# Altium PCB 20K Control Board V1.1.PcbDoc (part 12 of 24)
Units mm, origin at the board's own origin, x right, y up, seen from the top; angles counter-clockwise.
Board outline 132 x 260 mm, 4 copper layers (Top Layer, GND, VCC, Bottom Layer); 1384 components, 779 nets, 4515 pads, 1774 vias.
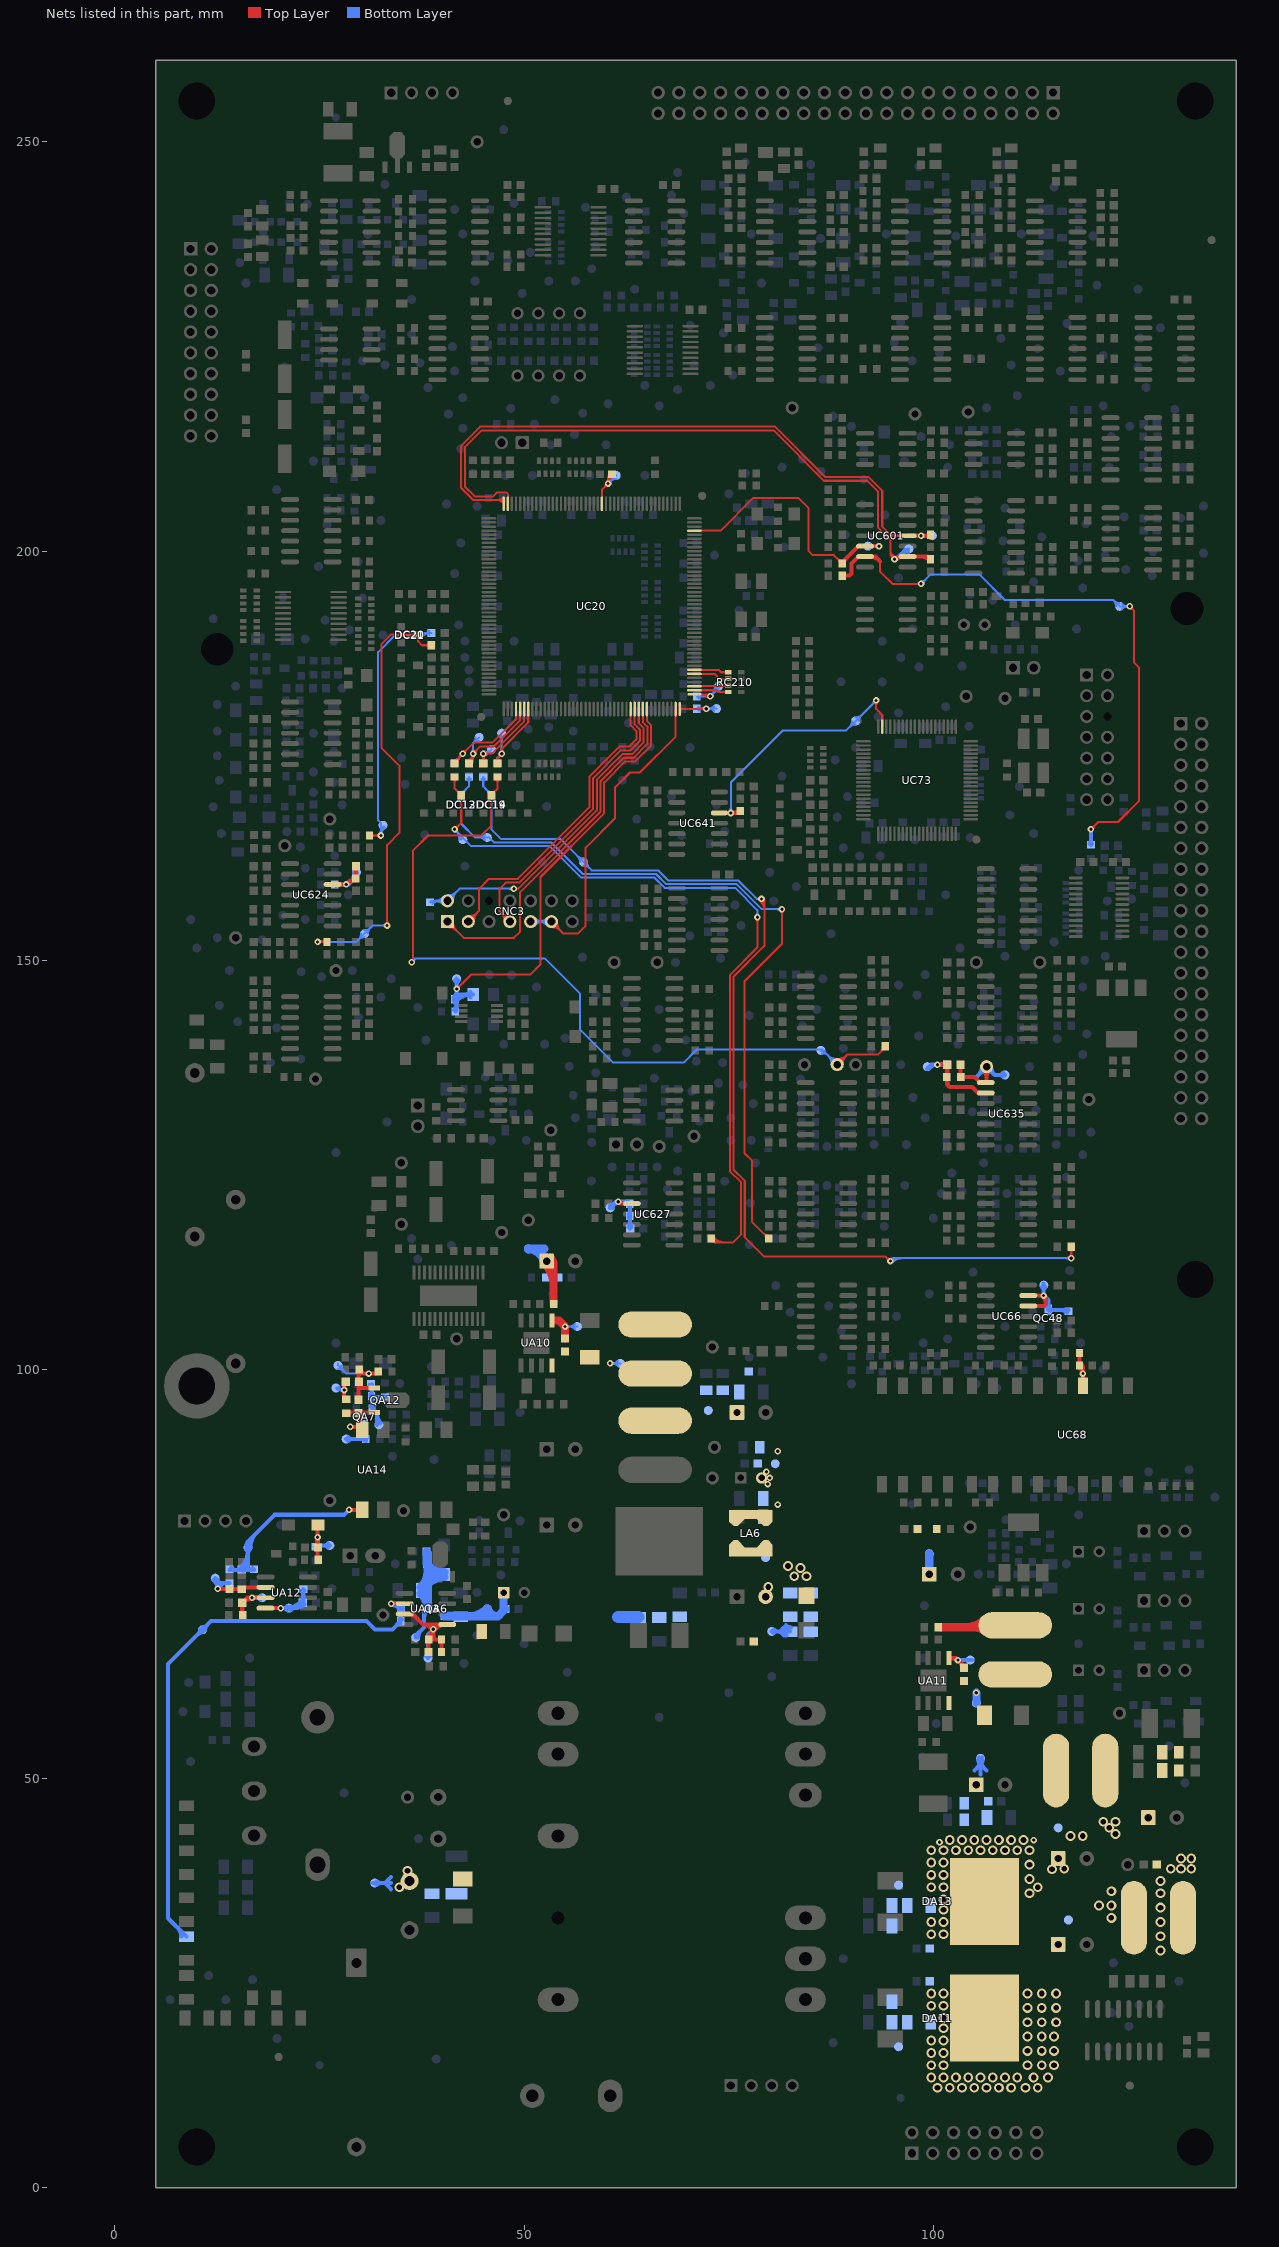
[diagram p14: the nets of this part, all layers, seen from the top]

## Via types
v1: diameter 0.8, hole 0.4, Top Layer to Bottom Layer, tented both sides, 1354 vias
v2: diameter 1.2, hole 0.7, Top Layer to Bottom Layer, 261 vias
v3: diameter 0.8, hole 0.4, Top Layer to Bottom Layer, 58 vias
v4: diameter 1.2, hole 0.7, Top Layer to Bottom Layer, tented top, 58 vias
v5: diameter 0.8, hole 0.4, Top Layer to Bottom Layer, tented top, 22 vias
v6: diameter 1.2, hole 0.7, Top Layer to Bottom Layer, tented both sides, 13 vias
v7: diameter 1.2, hole 0.7, Top Layer to Bottom Layer, tented bottom, 8 vias

## Nets (pads, with @x,y where several pads share a name; then routed paths per layer and width w, separated by ;. In a path a pad name is that pad's centre, name@x,y a point inside that pad or via, vN(x,y) a via of type N, cw(c..) or ccw(c..) an arc to the next point about the centre after c; other vN are vias at no path point) (continued)
M.GFCI: DC19.3 pad.ICT@86.25,139 RC171.2 RC241.1 TP20.1 | length 115.2
  Top Layer w0.25: v1(36.25,149.75) 36.425,149.925 36.425,163.425 38.25,165.25 44.75,165.25 45.965,166.465 DC19.3@45.965,170.032 45.965,170.215 46.75,171 RC241.1@46.75,172.4 ; DC19.3@45.73,169.619 cw(c45.163,169.052) 45.965,169.052 cw(c46.767,169.052) DC19.3@46.2,169.619 ; DC19.3@45.965,170.542 ccw(c45.965,171.331) 46.523,170.773 ; DC19.3@46.297,170.21 cw(c47.112,170.21) 46.536,170.786 ; RC241.1@46.52,172.17 cw(c45.965,171.615) 46.75,171.615 cw(c47.535,171.615) RC241.1@46.98,172.17 ; TP20.1@88,137.25 TP20.1@88.125,137.375 ; TP20.1@88.25,137.25 89.5,138.5 93.25,138.5 94.1,139.35 RC171.2@94.1,139.5 ; TP20.1@88.25,137.675 ccw(c88.25,138.701) 88.976,137.976 ccw(c89.701,137.25) TP20.1@88.675,137.25 ; TP20.1@88.25,137.925 ccw(c88.25,139.555) 89.402,138.402 ccw(c90.555,137.25) TP20.1@88.925,137.25 ; 93.474,138.724 ccw(c92.749,139.45) RC171.2@93.775,139.45 ; 93.716,138.966 cw(c94.1,138.582) RC171.2@94.1,139.125
  Bottom Layer w0.25: v1(36.25,149.75) 36.75,150.25 52.523,150.25 56.8,145.973 56.8,141.564 60.864,137.5 69.5,137.5 71.1,139.1 86.4,139.1 86.903,138.597 TP20.1@88.25,137.25 ; v1@36.25,150.025 ccw(c36.25,150.689) 36.719,150.219 ccw(c37.189,149.75) v1@36.525,149.75 ; pad.ICT@86.313,138.837 cw(c86.463,138.45) 86.757,138.743 ; pad.ICT@86.404,138.604 cw(c86.615,138.059) 87.028,138.472 ; pad.ICT@86.675,139 ccw(c87.097,139) 86.799,138.701 ; TP20.1@87.575,137.25 ccw(c85.945,137.25) 87.098,138.402 ccw(c88.25,139.555) TP20.1@88.25,137.925 ; TP20.1@87.825,137.25 ccw(c86.799,137.25) 87.524,137.976 ccw(c88.25,138.701) TP20.1@88.25,137.675
M.GFCI.AD: CC149.2 pad.ICT@47.25,177.75 RC241.2 UC20.51 | length 19.3
  Top Layer w0.25: RC241.2@46.555,174.36 ccw(c46.263,174.75) 46.75,174.75 ; RC241.2@46.75,174.05 RC241.2@46.775,174.075 ; RC241.2@46.75,174.1 46.75,174.75 ; RC241.2@46.945,174.36 cw(c47.237,174.75) 46.75,174.75 ; v1@46.975,175.25 cw(c46.311,175.25) 46.781,174.781 cw(c47.25,174.311) v1@47.25,174.975 ; v1@47.079,175.466 ccw(c46.801,175.818) 47.25,175.818 ; v1@47.421,175.466 cw(c47.699,175.818) 47.25,175.818 ; UC20.51@50.5,180.7 50.5,179.068 47.25,175.818 ; 46.75,174.75 v1(47.25,175.25) 47.25,175.818
  Bottom Layer w0.25: CC149.2@46.542,174.362 ccw(c46.284,174.75) 46.75,174.75 ; CC149.2@46.75,174.05 CC149.2@46.75,174.1 ; CC149.2@46.85,174.1 CC149.2@46.75,174.1 ; pad.ICT@46.949,177.449 cw(c46.224,176.724) 47.25,176.724 cw(c48.276,176.724) pad.ICT@47.551,177.449 ; CC149.2@46.958,174.362 cw(c47.216,174.75) 46.75,174.75 ; v1@46.975,175.25 cw(c46.311,175.25) 46.781,174.781 cw(c47.25,174.311) v1@47.25,174.975 ; v1@47.056,175.444 ccw(c46.586,175.914) 47.25,175.914 ccw(c47.914,175.914) v1@47.444,175.444 ; pad.ICT@47.25,177.5 v1(47.25,175.25) 46.75,174.75 ; CC149.2@46.75,174.1 46.75,174.75
M.RELAY.CONTROL: pad.ICT@92,200.605 RC253.2 UC20.129 UC601.5 | length 37.8
  Top Layer w0.25: UC20.129@70.8,202.5 73.25,202.5 ; 73.5,202.5 73.25,202.5 ; 88.21,199.14 ccw(c88.85,199.78) RC253.2@88.85,198.875 ; 88.331,199.019 cw(c87.861,198.55) RC253.2@88.525,198.55 ; RC253.2@88.9,198.55 RC253.2@88.85,198.5 87.85,199.5 85.25,199.5 84.75,200 84.75,205.25 83.5,206.5 81.5,206.5 78,206.5 74,202.5 73.25,202.5
  Top Layer w0.5: RC253.2@88.85,198.6 90.855,200.605 UC601.5@91.65,200.605 v1(93.355,200.605) ; RC253.2@89.05,198.55 cw(c89.654,198.55) RC253.2@89.227,198.977
  Bottom Layer w0.25: pad.ICT@91.645,200.605 v1(93.355,200.605) ; pad.ICT@92.301,200.304 cw(c93.026,199.579) 93.026,200.605 cw(c93.026,201.631) pad.ICT@92.301,200.906 ; v1@93.161,200.411 ccw(c92.691,199.941) 92.691,200.605 ccw(c92.691,201.269) v1@93.161,200.799
M.RELY.CNTL: pad.ICT@122.75,193.25 RC254.1 RC360.2 UC601.6 | length 86.2
  Top Layer w0.25: 93.5,198.75 93.5,197.5 95,196 v1(98.5,196) ; v1@98.306,195.806 ccw(c97.836,195.336) 97.836,196 ccw(c97.836,196.664) v1@98.306,196.194 ; v1(119.25,166) 120.15,166.9 122.559,166.9 125.15,169.491 125.15,185.759 124.5,186.409 124.5,192.75 v1(124,193.25) ; v1@119.25,166.275 ccw(c119.25,166.939) 119.719,166.469 ccw(c120.189,166) v1@119.525,166 ; v1@124,192.975 cw(c124,192.311) 124.469,192.781 cw(c124.939,193.25) v1@124.275,193.25
  Top Layer w0.5: RC254.1@88.85,197 89.75,197 90,197.25 90,198.5 90.835,199.335 UC601.6@91.65,199.335 92.915,199.335 93.5,198.75 ; RC254.1@88.991,196.859 cw(c89.333,196.517) 89.333,197 cw(c89.333,197.483) RC254.1@88.991,197.141 ; UC601.6@92.45,199.285 cw(c92.45,198.042) 93.329,198.921 ; UC601.6@92.463,199.287 cw(c92.645,198.6) 93.147,199.103
  Bottom Layer w0.25: v1(98.5,196) 98.525,196 99.675,197.15 105.6,197.15 108.75,194 122,194 pad.ICT@122.75,193.25 v1(124,193.25) ; v1@98.5,196.275 ccw(c98.5,197) 99.013,196.487 ; v1@98.775,196 cw(c99.378,196) 98.952,196.426 ; pad.ICT@122.325,193.25 ccw(c121.299,193.25) 122.024,193.976 ccw(c122.75,194.701) pad.ICT@122.75,193.675 ; pad.ICT@123.051,192.949 cw(c123.776,192.224) 123.776,193.25 cw(c123.776,194.276) pad.ICT@123.051,193.551 ; v1@123.806,193.056 ccw(c123.336,192.586) 123.336,193.25 ccw(c123.336,193.914) v1@123.806,193.444
  Bottom Layer w0.5: RC360.2@119.109,164.241 ccw(c118.767,164.583) 119.25,164.583 ccw(c119.733,164.583) RC360.2@119.391,164.241 ; RC360.2@119.25,164.1 v1(119.25,166)
M.SEL_A: pad.2@97,200.25 RC244.2 UC20.175 UC601.9 | length 98.1
  Top Layer w0.25: UC20.175@48,205.8 48,207 47.85,207.15 46.65,207.15 46.2,206.7 43.95,206.7 42.75,207.9 42.75,212.679 44.821,214.75 80.477,214.75 86.627,208.6 91.9,208.6 93.25,207.25 93.25,202.864 94.75,201.364 94.75,199.835 ; v1@94.975,199 ccw(c94.311,199) 94.781,199.469 ccw(c95.25,199.939) v1@95.25,199.275 ; 94.99,199.595 cw(c94.423,199.027) v1@95.225,199.001 ; v1@95.091,199.159 cw(c95.516,198.734) 95.516,199.335 ; v1@95.406,199.226 ccw(c95.521,199.394) 95.665,199.25 ; UC601.9@95.914,199.25 ccw(c95.914,198.336) 95.268,198.982 cw(c96.119,198.131) UC601.9@96.119,199.335 ; UC601.9@95.926,199.211 ccw(c95.628,198.913) 95.628,199.335 ccw(c95.628,199.757) UC601.9@95.926,199.459 ; UC601.9@96.517,199.25 ccw(c96.517,197.733) 95.444,198.806 cw(c96.723,197.527) UC601.9@96.723,199.335 ; UC601.9@96.765,199.25 95.665,199.25 ; UC601.9@96.85,199.335 95.25,199.335 94.75,199.835 ; 94.75,199.835 94.75,199.5 v1(95.25,199) 95.415,199 95.665,199.25
  Top Layer w0.5: UC601.9@96.85,199.335 99.315,199.335 RC244.2@99.65,199 ; 98.479,199.335 cw(c98.479,197.879) RC244.2@99.509,198.909
  Bottom Layer w0.25: v1(95.25,199) 96.5,200.25 pad.2@97,200.25 ; v1@95.25,199.275 ccw(c95.25,199.939) 95.719,199.469 ccw(c96.189,199) v1@95.525,199 ; v1@95.421,199.171 cw(c97,197.592) pad.2@97,199.825 ; 95.848,199.598 cw(c97,198.445) pad.2@97,200.075 ; 96.274,200.024 cw(c97,199.299) pad.2@97,200.325
M.SEL_B: pad.ICT@99.875,201.875 RC250.2 UC20.176 UC601.11 | length 85.1
  Top Layer w0.25: 46.715,206.25 ccw(c46.715,207.335) UC20.176@47.482,206.568 ; 47.05,206.25 UC20.176@47.5,205.8 47.5,206.45 47.3,206.25 43.764,206.25 42.3,207.714 42.3,212.866 44.634,215.2 80.664,215.2 86.814,209.05 92.086,209.05 93.75,207.386 93.75,203 94.875,201.875 UC601.11@96.85,201.875 ; UC20.176@47.387,206.337 ccw(c47.173,206.55) UC20.176@47.475,206.55 ; UC601.11@95.926,201.751 ccw(c95.628,201.453) 95.628,201.875 ccw(c95.628,202.297) UC601.11@95.926,201.999
  Top Layer w0.5: UC601.11@96.85,201.875 v1(98.5,201.875) RC250.2@99.65,201.875 ; 98.986,201.875 ccw(c98.986,202.614) RC250.2@99.509,202.091
  Bottom Layer w0.25: v1(98.5,201.875) pad.ICT@99.875,201.875 ; v1@98.694,201.681 cw(c99.164,201.211) 99.164,201.875 cw(c99.164,202.539) v1@98.694,202.069 ; pad.ICT@99.574,201.574 ccw(c98.849,200.849) 98.849,201.875 ccw(c98.849,202.901) pad.ICT@99.574,202.176
M.T\R\S\T\: CNC3.2 RC283.2 UC20.78 | length 52.8
  Top Layer w0.25: CNC3.2@40.63,157.27 CNC3.2@40.63,157.766 ; v1(48.75,158.75) 49.298,158.75 ; v1@48.97,158.586 cw(c49.298,158.341) 49.298,158.75 ; v1@48.97,158.914 ccw(c49.298,159.159) 49.298,158.75 ; UC20.78@63.975,180.7 UC20.78@64,180.7 ; UC20.78@64,180.475 64,178.977 64.603,178.374 64.603,176.624 63.182,175.204 61.999,175.204 58.875,172.08 58.875,168.327 49.298,158.75
  Bottom Layer w0.25: RC283.2@38.5,157.1 38.67,157.27 CNC3.2@40.63,157.27 42.11,158.75 v1(48.75,158.75) ; RC283.2@38.603,157.047 cw(c39.141,156.509) 39.141,157.27 ; RC283.2@38.78,156.87 cw(c39.745,155.905) 39.745,157.27 ; CNC3.2@40.153,156.793 ccw(c39,155.64) 39,157.27 ccw(c39,158.9) CNC3.2@40.153,157.747 ; CNC3.2@40.329,156.969 ccw(c39.604,156.244) 39.604,157.27 ccw(c39.604,158.296) CNC3.2@40.329,157.571 ; CNC3.2@40.63,157.695 ccw(c40.63,158.721) 41.356,157.996 ccw(c42.081,157.27) CNC3.2@41.055,157.27 ; CNC3.2@40.63,157.945 ccw(c40.63,159.575) 41.782,158.422 ccw(c42.935,157.27) CNC3.2@41.305,157.27 ; v1@48.556,158.556 ccw(c48.086,158.086) 48.086,158.75 ccw(c48.086,159.414) v1@48.556,158.944
M.TCK: CNC3.9 CNC3.11 UC20.87 | length 52
  Top Layer w0.25: CNC3.11@53.33,154.055 cw(c53.33,152.425) 54.482,153.578 cw(c55.635,154.73) CNC3.11@54.005,154.73 ; CNC3.11@53.33,154.305 cw(c53.33,153.279) 54.056,154.004 cw(c54.781,154.73) CNC3.11@53.755,154.73 ; CNC3.11@53.33,154.73 54.81,153.25 56.522,153.25 57.5,154.228 57.5,163.77 61.125,167.395 61.125,171.148 62.927,172.95 64.11,172.95 68.5,177.34 UC20.87@68.5,180.7
  Bottom Layer w0.25: CNC3.9@50.79,154.73 CNC3.11@53.33,154.73 ; CNC3.9@51.091,154.429 cw(c51.816,153.704) 51.816,154.73 cw(c51.816,155.756) CNC3.9@51.091,155.031 ; CNC3.9@51.267,154.253 cw(c52.42,153.1) 52.42,154.73 cw(c52.42,156.36) CNC3.9@51.267,155.207 ; CNC3.11@52.853,154.253 ccw(c51.7,153.1) 51.7,154.73 ccw(c51.7,156.36) CNC3.11@52.853,155.207 ; CNC3.11@53.029,154.429 ccw(c52.304,153.704) 52.304,154.73 ccw(c52.304,155.756) CNC3.11@53.029,155.031
M.TDI: CNC3.3 UC20.76 | length 41.7
  Top Layer w0.25: CNC3.3@43.17,154.73 44.5,156.06 44.5,158.75 45.7,159.95 49.225,159.95 57.975,168.7 57.975,172.453 61.63,176.108 62.808,176.108 63.699,176.999 63.699,177.5 63.699,178 63,178.699 UC20.76@63,180.7 ; CNC3.3@43.17,155.155 ccw(c43.17,156.181) 43.896,155.456 ccw(c44.621,154.73) CNC3.3@43.595,154.73 ; CNC3.3@43.17,155.405 ccw(c43.17,157.035) 44.322,155.882 ccw(c45.475,154.73) CNC3.3@43.845,154.73
M.TDO: CNC3.7 UC20.77 | length 39.7
  Top Layer w0.25: CNC3.7@47.575,154.73 ccw(c45.945,154.73) 47.098,155.882 ccw(c48.25,157.035) CNC3.7@48.25,155.405 ; CNC3.7@47.825,154.73 ccw(c46.799,154.73) 47.524,155.456 ccw(c48.25,156.181) CNC3.7@48.25,155.155 ; CNC3.7@48.25,154.73 47,155.98 47,158.75 47.75,159.5 49.412,159.5 58.425,168.513 58.425,172.266 61.815,175.656 62.995,175.656 64.151,176.811 64.151,178.187 63.5,178.838 UC20.77@63.5,180.7
M.TESTPOINT1: RC210.4 UC20.90 | length 4.7
  Top Layer w0.25: UC20.90@70.8,183 73.5,183 73.7,182.8 RC210.4@74.95,182.8 ; RC210.4@74.712,182.712 ccw(c74.498,182.498) 74.498,182.8 ccw(c74.498,183.102) RC210.4@74.712,182.888
M.TESTPOINT2: RC210.3 UC20.91 | length 4.5
  Top Layer w0.25: UC20.91@70.8,183.5 RC210.3@74.8,183.5 ; 74.257,183.5 ccw(c74.257,184.143) RC210.3@74.712,183.688
M.TESTPOINT3: RC210.2 UC20.94 | length 4.9
  Top Layer w0.25: UC20.94@70.8,185 73.25,185 73.85,184.4 RC210.2@74.95,184.4 ; RC210.2@74.712,184.312 ccw(c74.498,184.098) 74.498,184.4 ccw(c74.498,184.702) RC210.2@74.712,184.488
M.TESTPOINT4: RC210.1 UC20.95 | length 4.7
  Top Layer w0.25: UC20.95@70.8,185.5 73.75,185.5 74.05,185.2 RC210.1@74.95,185.2 ; RC210.1@74.712,185.112 ccw(c74.498,184.898) 74.498,185.2 ccw(c74.498,185.502) RC210.1@74.712,185.288
M.TMS: CNC3.1 UC20.79 | length 48.8
  Top Layer w0.25: CNC3.1@40.63,154.055 cw(c40.63,152.425) 41.782,153.578 cw(c42.935,154.73) CNC3.1@41.305,154.73 ; CNC3.1@40.63,154.305 cw(c40.63,153.279) 41.356,154.004 cw(c42.081,154.73) CNC3.1@41.055,154.73 ; CNC3.1@40.63,154.73 42.61,152.75 48.75,152.75 49.5,153.5 49.5,158.315 59.325,168.14 59.325,171.893 62.186,174.754 63.369,174.754 65.053,176.438 65.053,178.561 64.5,179.113 UC20.79@64.5,180.7 UC20.79@64.475,180.675
M.VGRIDR: DC12.3 pad.ICT@42.5,164.75 RC14.2 RC218.1 | length 111.1
  Top Layer w0.25: RC218.1@41.27,172.17 cw(c40.715,171.615) 41.5,171.615 cw(c42.285,171.615) RC218.1@41.73,172.17 ; v1(41.5,166) 42.31,166.81 DC12.3@42.31,170.032 42.31,170.19 41.5,171 RC218.1@41.5,172.4 ; v1@41.5,166.275 ccw(c41.5,166.939) 41.969,166.469 ccw(c42.439,166) v1@41.775,166 ; 41.709,170.791 ccw(c42.31,171.392) DC12.3@42.31,170.542 ; 41.757,170.743 cw(c41.224,170.21) DC12.3@41.978,170.21 ; DC12.3@42.075,169.619 cw(c41.508,169.052) 42.31,169.052 cw(c43.112,169.052) DC12.3@42.545,169.619 ; RC14.2@72.726,115.826 ccw(c73.514,116.614) 73.514,115.5 ; RC14.2@72.85,116 73.35,115.5 75.475,115.5 76.5,116.525 76.5,122.864 75.125,124.239 75.125,148.193 78.5,151.568 v1(78.5,155.25) ; RC14.2@72.901,115.629 cw(c72.987,115.087) 73.375,115.475 ; RC14.2@72.903,116.003 ccw(c74.117,117.217) 74.117,115.5 ; RC14.2@73.08,116.18 ccw(c74.721,117.821) 74.721,115.5 ; RC14.2@73.175,115.95 ccw(c73.839,115.95) 73.369,115.481 ; v1@78.306,155.056 cw(c77.836,154.586) 78.5,154.586 cw(c79.164,154.586) v1@78.694,155.056
  Bottom Layer w0.25: v1@41.5,165.725 cw(c41.5,165.061) 41.969,165.531 cw(c42.439,166) v1@41.775,166 ; v1(41.5,166) 43.55,163.95 46.25,163.95 ; v1@41.598,165.902 cw(c40.445,164.75) pad.ICT@42.075,164.75 ; 42.024,165.476 cw(c41.299,164.75) pad.ICT@42.325,164.75 ; 42.201,165.299 ccw(c42.5,165.597) pad.ICT@42.5,165.175 ; 44.55,163.95 46.25,163.95 ; v1@78.306,155.444 ccw(c77.836,155.914) 78.5,155.914 ccw(c79.164,155.914) v1@78.694,155.444 ; v1(78.5,155.25) 78.5,156.122 75.772,158.85 67.173,158.85 65.923,160.1 56.95,160.1 53.1,163.95 46.25,163.95
M.VGRIDR.AD: CC132.2 RC218.2 UC20.48 | length 19.7
  Top Layer w0.25: RC218.2@41.541,174.067 RC218.2@41.567,174.092 ; RC218.2@41.55,174.425 ccw(c41.55,174.727) RC218.2@41.763,174.513 ; RC218.2@41.567,174.067 RC218.2@41.567,174.092 ; RC218.2@41.625,174.1 cw(c42.289,174.1) 41.819,174.569 ; RC218.2@41.875,174.1 cw(c43.142,174.1) v1@42.246,174.996 ; v1@42.225,175.25 cw(c41.561,175.25) 42.031,174.781 cw(c42.5,174.311) v1@42.5,174.975 ; v1@42.5,175.525 ccw(c42.5,176.189) 42.969,175.719 ccw(c43.439,175.25) v1@42.775,175.25 ; UC20.48@48.975,180.675 UC20.48@49,180.7 49,179.477 46.123,176.6 43.85,176.6 v1(42.5,175.25) 41.567,174.317 RC218.2@41.567,174.092
  Bottom Layer w0.25: CC132.2@41.5,174.05 41.5,174.25 v1(42.5,175.25) ; CC132.2@41.5,174.425 ccw(c41.5,174.847) CC132.2@41.799,174.549 ; CC132.2@41.625,174.05 cw(c42.41,174.05) 41.855,174.605 ; CC132.2@41.875,174.05 cw(c43.263,174.05) v1@42.282,175.032 ; v1@42.225,175.25 cw(c41.561,175.25) 42.031,174.781 cw(c42.5,174.311) v1@42.5,174.975
M.VGRIDR.ZERO: pad.ICT@73.5,180.75 RC513.1 UC20.88 | length 12.3
  Top Layer w0.25: UC20.88@69,180.45 69.25,180.7 ; UC20.88@69,180.7 69.25,180.7 ; UC20.88@69,180.95 69.25,180.7 ; 71.465,180.7 ccw(c71.465,181.535) v1@72.056,180.944 ; 71.707,180.7 cw(c71.707,180.207) v1@72.056,180.556 ; v1@72.2,180.7 69.25,180.7
  Bottom Layer w0.25: RC513.1@71.1,180.75 v1(72.25,180.75) pad.ICT@73.5,180.75 ; RC513.1@71.33,180.52 cw(c71.885,179.965) 71.885,180.75 cw(c71.885,181.535) RC513.1@71.33,180.98 ; v1@72.056,180.556 ccw(c71.586,180.086) 71.586,180.75 ccw(c71.586,181.414) v1@72.056,180.944 ; v1@72.444,180.556 cw(c72.914,180.086) 72.914,180.75 cw(c72.914,181.414) v1@72.444,180.944 ; pad.ICT@73.199,180.449 ccw(c72.474,179.724) 72.474,180.75 ccw(c72.474,181.776) pad.ICT@73.199,181.051
M.VGRIDS: DC13.3 pad.ICT@45.5,165 RC72.2 RC219.1 | length 101.5
  Top Layer w0.25: 79.198,116.666 ccw(c79.9,117.368) RC72.2@79.9,116.375 ; 79.406,116.457 cw(c78.999,116.05) RC72.2@79.575,116.05 ; RC72.2@79.9,116 79.864,116 77.85,118.014 77.85,125.514 76.925,126.439 76.925,147.448 81.5,152.023 v1(81.499,156.251) ; v1@81.305,156.056 cw(c80.834,155.585) 81.5,155.585 ; 81.5,155.589 cw(c82.161,155.589) v1@81.694,156.056
  Bottom Layer w0.25: DC13.3@42.05,169.619 cw(c41.483,169.052) 42.285,169.052 cw(c43.087,169.052) DC13.3@42.52,169.619 ; DC13.3@42.285,170.032 42.285,166.715 44,165 pad.ICT@45.5,165 45.75,165 46.35,164.4 53.286,164.4 57.136,160.55 66.109,160.55 67.359,159.3 75.958,159.3 79.008,156.251 v1(81.499,156.251) ; DC13.3@42.285,170.285 43.25,171.25 RC219.1@43.25,172.4 ; DC13.3@42.285,170.542 ccw(c42.285,171.163) 42.724,170.724 ; DC13.3@42.617,170.21 cw(c43.6,170.21) 42.905,170.905 ; RC219.1@43.02,172.17 cw(c42.465,171.615) 43.25,171.615 cw(c44.035,171.615) RC219.1@43.48,172.17 ; pad.ICT@45.199,164.699 ccw(c44.474,163.974) 44.474,165 ccw(c44.474,166.026) pad.ICT@45.199,165.301 ; v1@81.305,156.056 ccw(c80.835,155.587) 80.835,156.251 ccw(c80.835,156.915) v1@81.305,156.445
M.VGRIDS.AD: CC133.2 pad.ICT@44.5,177.25 RC219.2 UC20.49 | length 26.3
  Top Layer w0.25: CC133.2@43.135,174.407 ccw(c42.865,175.25) v1(43.75,175.25) ; CC133.2@43.2,174.1 43.75,174.65 ; CC133.2@43.212,174.169 ccw(c42.975,174.907) v1@43.75,174.907 ; CC133.2@43.25,174.425 ccw(c43.25,175.089) 43.719,174.619 ; CC133.2@43.288,173.931 ccw(c43.085,174.564) 43.75,174.564 ; v1@43.57,175.042 cw(c43.233,174.65) 43.75,174.65 ; CC133.2@43.613,174.145 cw(c44.122,174.278) 43.75,174.65 ; v1@43.75,175.525 ccw(c43.75,176.189) 44.219,175.719 ccw(c44.689,175.25) v1@44.025,175.25 ; v1@43.93,175.042 ccw(c44.267,174.65) 43.75,174.65 ; UC20.49@49.5,180.7 49.5,179.341 46.309,176.15 44.65,176.15 v1(43.75,175.25) ; 43.75,174.65 v1(43.75,175.25)
  Bottom Layer w0.25: RC219.2@43.178,174.401 ccw(c42.834,175.25) v1(43.75,175.25) ; RC219.2@43.272,174.17 ccw(c42.985,174.879) v1@43.75,174.879 ; RC219.2@43.35,174.1 RC219.2@43.25,174.1 43.75,174.6 ; RC219.2@43.366,173.938 ccw(c43.135,174.508) RC219.2@43.75,174.508 ; v1@43.556,175.444 ccw(c43.086,175.914) 43.75,175.914 ccw(c44.414,175.914) v1@43.944,175.444 ; v1@43.559,175.053 cw(c43.119,174.6) 43.75,174.6 ; v1@43.941,175.053 ccw(c44.381,174.6) 43.75,174.6 ; pad.ICT@44.075,177.25 cw(c43.049,177.25) 43.774,176.524 cw(c44.5,175.799) pad.ICT@44.5,176.825 ; pad.ICT@44.5,177.25 43.75,176.5 v1(43.75,175.25) ; 43.75,174.6 v1(43.75,175.25)
M.VGRIDS.ZERO: pad.ICT@73.75,183.5 RC514.1 UC20.89 | length 13.1
  Top Layer w0.25: UC20.89@70.8,182.5 72.5,182.5 v1(72.75,182.25) ; UC20.89@71.483,182.5 cw(c71.483,180.983) v1@72.556,182.056 ; 72.086,182.5 cw(c72.086,181.586) v1@72.732,182.232
  Bottom Layer w0.25: RC514.1@71.1,182.25 v1(72.75,182.25) pad.ICT@74,183.5 ; RC514.1@71.33,182.02 cw(c71.885,181.465) 71.885,182.25 cw(c71.885,183.035) RC514.1@71.33,182.48 ; v1@72.556,182.056 ccw(c72.086,181.586) 72.086,182.25 ccw(c72.086,182.914) v1@72.556,182.444 ; v1@72.75,182.525 ccw(c72.75,183.189) 73.219,182.719 ccw(c73.689,182.25) v1@73.025,182.25 ; v1@72.875,182.375 ccw(c71.788,183.462) pad.ICT@73.325,183.492 ; 73.29,182.79 ccw(c72.603,183.478) pad.ICT@73.575,183.497 ; 73.451,182.951 cw(c73.75,182.653) pad.ICT@73.75,183.075
M.VGRIDT: DC14.3 pad.ICT@57.25,162 RC128.2 RC220.1 | length 147.7
  Top Layer w0.25: v1@78.806,157.306 cw(c77.491,155.991) 79.35,155.991 ; v1@78.982,157.482 cw(c78.095,156.595) 79.35,156.595 ; v1(79,157.5) 79.35,157.15 79.35,151.782 75.575,148.007 75.575,124.425 76.95,123.05 76.95,116.164 79.314,113.8 94.1,113.8 v1@94.7,113.2 ; v1@79.159,157.659 cw(c78.698,157.198) 79.35,157.198 ; 94.15,113.75 ccw(c94.696,114.296) v1@94.736,113.525 ; 94.351,113.549 cw(c94.052,113.25) v1@94.475,113.25 ; RC128.2@116.62,114.72 cw(c116.065,114.165) 116.85,114.165 cw(c117.635,114.165) RC128.2@117.08,114.72 ; v1@116.656,113.794 ccw(c116.186,114.264) 116.85,114.264 ccw(c117.514,114.264) v1@117.044,113.794 ; v1(116.85,113.6) RC128.2@116.85,115
  Bottom Layer w0.25: RC220.1@44.77,172.17 cw(c44.215,171.615) 45,171.615 cw(c45.785,171.615) RC220.1@45.23,172.17 ; RC220.1@45,172.4 45,171.25 45.341,170.909 46.035,170.215 DC14.3@46.035,170.032 46.035,165.965 47.15,164.85 54.4,164.85 58.25,161 66.35,161 67.6,159.75 76.145,159.75 78.395,157.5 ; 45.464,170.786 cw(c44.888,170.21) DC14.3@45.703,170.21 ; 45.477,170.773 ccw(c46.035,171.331) DC14.3@46.035,170.542 ; DC14.3@45.8,169.619 cw(c45.233,169.052) 46.035,169.052 cw(c46.837,169.052) DC14.3@46.27,169.619 ; pad.ICT@56.825,162 ccw(c55.799,162) 56.524,162.726 ccw(c57.25,163.451) pad.ICT@57.25,162.425 ; pad.ICT@57.25,161.575 cw(c57.25,160.549) 57.976,161.274 cw(c58.701,162) pad.ICT@57.675,162 ; v1@78.793,157.319 ccw(c78.395,156.972) 78.395,157.5 ; v1@78.793,157.681 cw(c78.395,158.028) 78.395,157.5 ; v1(79,157.5) 78.395,157.5 ; v1@94.591,113.409 cw(c95.052,112.948) 95.052,113.6 ; v1(94.75,113.25) 95.1,113.6 v1(116.85,113.6) ; v1@94.768,113.232 cw(c95.655,112.345) 95.655,113.6 ; v1@94.944,113.056 cw(c96.259,111.741) 96.259,113.6 ; v1@116.656,113.406 ccw(c116.186,112.936) 116.186,113.6 ccw(c116.186,114.264) v1@116.656,113.794
M.VGRIDT.AD: CC134.2 pad.ICT@46,175.75 RC220.2 UC20.50 | length 20.7
  Top Layer w0.25: CC134.2@44.735,174.315 ccw(c44.095,174.955) 45,174.955 ccw(c45.905,174.955) CC134.2@45.265,174.315 ; v1@44.806,175.056 cw(c44.336,174.586) 45,174.586 cw(c45.664,174.586) 45.194,175.056 cw(c45.664,174.586) 45.664,175.25 cw(c45.664,175.914) v1@45.194,175.444 ; CC134.2@45,174.05 v1(45,175.25) 46.046,175.25 50,179.204 UC20.50@50,180.7
  Bottom Layer w0.25: RC220.2@44.77,174.33 ccw(c44.215,174.885) 45,174.885 ccw(c45.785,174.885) RC220.2@45.23,174.33 ; v1@44.806,175.056 cw(c44.336,174.586) 45,174.586 cw(c45.664,174.586) v1@45.194,175.056 ; RC220.2@44.85,174.1 RC220.2@45,174.25 ; v1@44.937,175.034 ccw(c45.069,175.487) 45.403,175.153 ; v1@45.007,175.274 ccw(c45.204,175.949) pad.ICT@45.702,175.452 ; v1@45.077,175.514 ccw(c45.339,176.41) pad.ICT@46,175.75 45.5,175.25 ; RC220.2@45.1,174.1 RC220.2@45,174.1 RC220.2@45,174.25 ; v1@45.232,175.103 cw(c45.5,174.933) 45.5,175.25 ; v1@45.232,175.397 ccw(c45.5,175.567) 45.5,175.25 ; RC220.2@45,174.25 v1(45,175.25) 45.5,175.25
M.VPV1: DC21.3 pad.ICT@32.75,166.5 RC4.2 RC255.1 | length 41.3
  Top Layer w0.25: RC4.2@31.1,165.25 v1(32.5,165.25) ; RC4.2@31.33,165.02 cw(c31.885,164.465) 31.885,165.25 cw(c31.885,166.035) RC4.2@31.33,165.48 ; v1@32.306,165.056 ccw(c31.836,164.586) 31.836,165.25 ccw(c31.836,165.914) v1@32.306,165.444
  Bottom Layer w0.25: v1@32.306,165.444 ccw(c31.836,165.914) 32.5,165.914 ccw(c33.164,165.914) v1@32.694,165.444 ; v1@32.5,165.225 cw(c33.616,165.225) pad.ICT@32.989,166.148 ; v1(32.5,165.25) 32.5,166.75 32.15,167.1 32.15,187.65 34.215,189.715 DC21.3@37.032,189.715 37.317,190 RC255.1@38.65,190 ccw(c38.65,188.343) DC21.3@37.45,189.486 ; 32.5,165.697 cw(c33.295,165.697) pad.ICT@32.848,166.355 ; DC21.3@36.619,189.48 ccw(c36.052,188.913) 36.052,189.715 ccw(c36.052,190.517) DC21.3@36.619,189.95 ; DC21.3@37.269,189.658 cw(c38.066,188.899) 38.066,190 ; RC255.1@38.42,189.77 ccw(c37.865,189.215) 37.865,190 ccw(c37.865,190.785) RC255.1@38.42,190.23
M.VPV2: DC20.3 pad.ICT@30.5,153.25 RC33.2 RC256.1 | length 66.7
  Top Layer w0.25: v1(24.75,152.25) RC33.2@25.9,152.25 RC33.2@25.9,152.35 ; v1@24.944,152.056 cw(c25.414,151.586) 25.414,152.25 cw(c25.414,152.914) v1@24.944,152.444 ; RC33.2@25.67,152.02 ccw(c25.115,151.465) 25.115,152.25 ccw(c25.115,153.035) RC33.2@25.67,152.48 ; v1@33.056,154.444 ccw(c32.586,154.914) 33.25,154.914 ccw(c33.914,154.914) v1@33.444,154.444 ; v1(33.25,154.25) 33.25,164.068 34.75,165.568 34.75,173.775 32.55,175.975 32.55,188.643 33.692,189.785 DC20.3@37.032,189.785 ; DC20.3@36.619,189.55 ccw(c36.052,188.983) 36.052,189.785 ccw(c36.052,190.587) DC20.3@36.619,190.02 ; DC20.3@36.797,189.55 cw(c36.23,188.983) 37.032,188.983 cw(c37.834,188.983) DC20.3@37.267,189.55 ; DC20.3@37.032,190.035 DC20.3@37.032,189.785 ; RC256.1@38.42,188.27 ccw(c37.865,187.715) 37.865,188.5 ccw(c37.865,189.285) RC256.1@38.42,188.73 ; RC256.1@38.65,188.5 37.5,188.5 37.032,188.968 DC20.3@37.032,189.785
  Bottom Layer w0.25: v1(24.75,152.25) 29.5,152.25 31.5,154.25 v1(33.25,154.25) ; v1@24.944,152.056 cw(c25.414,151.586) 25.414,152.25 cw(c25.414,152.914) v1@24.944,152.444 ; pad.ICT@30.075,153.25 cw(c29.049,153.25) 29.774,152.524 cw(c30.5,151.799) pad.ICT@30.5,152.825 ; pad.ICT@30.5,153.675 ccw(c30.5,154.701) 31.226,153.976 ccw(c31.951,153.25) pad.ICT@30.925,153.25 ; v1@33.056,154.056 ccw(c32.586,153.586) 32.586,154.25 ccw(c32.586,154.914) v1@33.056,154.444
M.X\R\S\: CC170.2 DC25.1 pad.ICT@41.75,147.75 RC270.1 UC20.80 | length 65.5
  Top Layer w0.25: v1(41.75,146.5) 43.5,148.25 50.75,148.25 52,149.5 52,152.75 ; v1@41.75,146.775 ccw(c41.75,147.439) 42.219,146.969 ccw(c42.689,146.5) v1@42.025,146.5 ; 52,152.45 52,152.75 ; UC20.80@65,180.7 65,179.25 65.503,178.747 65.503,176.251 63.551,174.3 62.368,174.3 59.775,171.707 59.775,167.954 52,160.179 52,152.75
  Bottom Layer w0.5: CC170.2@41.373,145.073 cw(c40.464,144.164) RC270.1@41.75,144.164 ; RC270.1@41.459,143.941 ccw(c40.755,144.645) 41.75,144.645 ; pad.ICT@41.538,147.538 cw(c41.026,147.026) 41.75,147.026 cw(c42.474,147.026) pad.ICT@41.962,147.538 ; RC270.1@41.6,143.75 RC270.1@41.6,143.9 ; CC170.2@41.6,145.3 42.1,145.8 DC25.1@43.75,145.8 ; CC170.2@41.727,145.073 cw(c43.481,143.319) DC25.1@43.481,145.8 ; RC270.1@41.75,143.9 v1(41.75,146.5) pad.ICT@41.75,147.75 ; v1@41.75,146.336 cw(c40.464,146.336) 41.373,145.427 cw(c42.274,144.526) 42.274,145.8 ; DC25.1@43.432,145.482 ccw(c42.664,144.714) 42.664,145.8 ccw(c42.664,146.886) DC25.1@43.432,146.118
MCPUTOSCPU: pad.ICT@61.25,209.25 RC661.1 UC20.152 | length 14
  Top Layer w0.25: UC20.152@59.5,205.8 59.5,207.5 v1(60.25,208.25) 60.25,208.9 ; v1@59.975,208.25 cw(c59.311,208.25) 59.781,207.781 cw(c60.25,207.311) v1@60.25,207.975 ; v1@60.059,208.447 ccw(c59.619,208.9) 60.25,208.9 ; v1@60.25,208.165 cw(c61.296,208.165) RC661.1@60.841,209.107 ; v1@60.25,208.563 cw(c61.104,208.563) RC661.1@60.733,209.332 ; 60.25,208.962 cw(c60.912,208.962) RC661.1@60.624,209.558 ; RC661.1@60.385,209.321 cw(c59.98,209.22) 60.275,208.925 cw(c60.642,208.558) RC661.1@60.678,209.076 ; v1@60.441,208.447 cw(c60.881,208.9) 60.25,208.9 ; RC661.1@60.75,209.4 60.25,208.9
  Bottom Layer w0.25: v1(60.25,208.25) pad.ICT@61.25,209.25 ; v1@60.25,208.525 ccw(c60.25,209.189) 60.719,208.719 ccw(c61.189,208.25) v1@60.525,208.25 ; pad.ICT@60.825,209.25 cw(c59.799,209.25) 60.524,208.524 cw(c61.25,207.799) pad.ICT@61.25,208.825
MDSP_OK: pad.ICT@90.493,179.243 RC658.2 UC73.79 UC641.12 | length 40.3
  Top Layer w0.25: v1@92.806,181.556 cw(c92.336,181.086) 93,181.086 cw(c93.664,181.086) v1@93.194,181.556 ; v1(93,181.75) 93,180.725 93.75,179.975 ; 93.25,180.475 93.75,179.975 ; UC73.79@93.75,178.55 93.75,179.975
  Top Layer w0.5: UC641.12@73.85,168.02 RC658.2@76.38,168.02 ; UC641.12@74.84,168.02 cw(c74.84,167.59) v1@75.144,167.894 ; v1@75.356,167.894 cw(c75.66,167.59) 75.66,168.02 ; v1@75.483,168.02 ccw(c75.483,169.117) RC658.2@76.259,168.341
  Bottom Layer w0.25: v1@75.056,168.194 ccw(c74.586,168.664) 75.25,168.664 ccw(c75.914,168.664) v1@75.444,168.194 ; v1(75.25,168) 75.25,171.724 81.626,178.1 89.35,178.1 pad.ICT@90.493,179.243 v1(93,181.75) ; pad.ICT@90.068,179.243 cw(c89.042,179.243) 89.767,178.517 cw(c90.493,177.792) pad.ICT@90.493,178.818 ; pad.ICT@90.493,179.668 ccw(c90.493,180.694) 91.218,179.968 ccw(c91.944,179.243) pad.ICT@90.918,179.243 ; v1@92.725,181.75 cw(c92.061,181.75) 92.531,181.281 cw(c93,180.811) v1@93,181.475
MORRCPU-SEL: pad.ICT@118.27,98 RC602.1 RC634.1 UC68.3 | length 11.3
  Top Layer w0.5: RC634.1@117.709,100.691 ccw(c117.367,101.033) 117.85,101.033 ccw(c118.333,101.033) RC634.1@117.991,100.691 ; RC602.1@117.709,101.809 cw(c117.367,101.467) 117.85,101.467 cw(c118.333,101.467) RC602.1@117.991,101.809 ; RC634.1@117.755,100.274 cw(c117.29,99.411) v1@118.27,99.411 ; RC602.1@117.85,102 RC634.1@117.85,100.5 118.27,100.08 v1(118.27,99.5) UC68.3@118.27,98 ; RC634.1@117.992,100.714 cw(c117.742,100.249) RC634.1@118.27,100.249 ; UC68.3@118.023,98.647 ccw(c117.425,99.245) 118.27,99.245 ccw(c119.115,99.245) UC68.3@118.517,98.647
  Bottom Layer w0.5: pad.ICT@118.058,98.212 ccw(c117.546,98.724) 118.27,98.724 ccw(c118.994,98.724) pad.ICT@118.482,98.212 ; pad.ICT@118.27,98 v1(118.27,99.5)
MSCI: pad.ICT@113.5,110.31 QC48.3 RC605.1 UC66.12 UC66.13 | length 15.8
  Top Layer w0.5: UC66.12@111.6,107.77 113.52,107.77 113.75,108 113.75,108.75 v1(113.46,109.04) UC66.13@111.6,109.04 ; v1@113.354,108.934 cw(c112.398,107.978) 113.75,107.978
  Bottom Layer w0.5: pad.ICT@113.288,110.098 cw(c112.872,109.682) 113.46,109.682 ; 113.46,109.489 cw(c114.321,109.489) pad.ICT@113.712,110.098 ; pad.ICT@113.46,110.5 v1(113.46,109.04) 114.035,108.465 QC48.3@114.035,107.282 RC605.1@116.5,107.282 ; QC48.3@113.888,107.606 ccw(c113.535,107.96) 114.035,107.96 ccw(c114.535,107.96) QC48.3@114.181,107.606 ; QC48.3@114.181,107.135 cw(c114.535,106.782) 114.535,107.282 cw(c114.535,107.782) QC48.3@114.181,107.429 ; 115.528,107.282 cw(c115.528,106.178) RC605.1@116.309,106.959
NetCA1_2: CA1.2 CA91.2 CA96.1 DA11.2 DA11.4 LA10.1 pad.ICT@116.5,32.75
  other v2: 100.5,12.25 102,12.25 103.5,12.25 105,12.25 106.5,12.25 108,12.25 109.5,12.25 111.25,12.25 112.75,12.25 99.75,13.5 101.25,13.5 102.75,13.5 104.25,13.5 105.75,13.5 107.25,13.5 108.75,13.5 110.25,13.5 112.25,13.5 114,13.5 99.75,15 101.25,15 111.5,15 113.25,15 114.75,15 99.75,16.5 101.25,16.5 111.5,16.75 113.25,16.75 114.75,16.75 99.75,18 101.25,18 111.5,18.5 113.25,18.5 114.75,18.5 101.25,19.5 111.5,20.25 113.25,20.25 115,20.25 101.25,20.75 111.5,22 113.25,22 115,22 99.75,22.25 101.25,22.25 99.75,23.75 101.25,23.75 111.5,23.75 113.25,23.75 115,23.75
  other v4: 121.75,33 120.25,34.5 121.75,34.5 121.75,36.25
NetCA2_1: CA2.1 CA101.1 CA104.2 DA13.2 DA13.4 LA14.1 pad.ICT@115.25,44
  other v2: 99.75,31 101.25,31 99.75,32.5 101.25,32.5 101.25,34 101.25,35.25 111.75,36 99.75,36.75 101.25,36.75 112.75,36.75 111.75,37.75 99.75,38.25 101.25,38.25 99.75,39.75 101.25,39.75 99.75,41.25 101.25,41.25 102.75,41.25 104.25,41.25 105.75,41.25 107.25,41.25 108.75,41.25 110.25,41.25 102,42.5 103.5,42.5 105,42.5 106.5,42.5 108,42.5 109.5,42.5 111,42.5
  other v3: 100.75,42.25 112.25,42.5
  other v4: 114.5,38.94 116,39 111.75,39.5 111.75,41.25 116.75,43 118.25,43 122.25,43.25 121.5,44 120.75,44.75 122.25,44.75
NetCA4_1: CA4.1 CA6.2 CA81.2 CA83.2 DA10.1 LA6.1 pad.ICT@79.5,77.025
  other v2: 83,74.75 84.5,74.75 83.75,75.75 82.25,76
  other v4: 79.813,73.419
NetCA6_1: CA6.1 CA83.1 pad.ICT@80.25,68 RA118.2 RA121.2 | length 9.1
  Bottom Layer w0.5: pad.ICT@80.25,68 81.25,68 ; pad.ICT@80.462,67.788 cw(c80.974,67.276) 80.974,68 cw(c80.974,68.724) pad.ICT@80.462,68.212 ; 81.162,67.913 cw(c81.808,67.267) RA118.2@82.304,68.034 ; 81.405,68 ccw(c81.405,68.795) RA118.2@81.967,68.233 ; RA118.2@81.6,68.35 cw(c82.152,67.798) RA118.2@82.576,68.454 ; RA118.2@81.951,67.685 ccw(c81.25,67.064) 81.25,68 ; 82,68.75 81.25,68 ; RA118.2@82.05,67.5 81.75,67.5 81.25,68 ; RA118.2@82.45,68 81.25,68
NetCA68_1: CA68.1 pad.ICT@61.5,69.75 RA108.2 RA109.2 | length 2.5
  Bottom Layer w1.5: pad.ICT@61.5,69.75 RA109.2@63.95,69.75
NetCA69_1: CA69.1 pad.ICT@56.5,105.25 UA10.1 | length 7.2
  Top Layer w1: 53.75,106 54.25,106 v1(55,105.25) CA69.1@55,103.8
  Bottom Layer w0.25: v1(55,105.25) pad.ICT@56.5,105.25 ; v1@55.194,105.056 cw(c55.664,104.586) 55.664,105.25 cw(c55.664,105.914) v1@55.194,105.444 ; pad.ICT@56.199,104.949 ccw(c55.474,104.224) 55.474,105.25 ccw(c55.474,106.276) pad.ICT@56.199,105.551
NetCA69_2: CA69.2 DA7.2 LA4.1 pad.ICT@61.75,100.75 UA10.8 | length 3.9
  Bottom Layer w0.25: v1(60.5,100.75) pad.ICT@61.75,100.75 ; v1@60.694,100.556 cw(c61.164,100.086) 61.164,100.75 cw(c61.164,101.414) v1@60.694,100.944 ; pad.ICT@61.449,100.449 ccw(c60.724,99.724) 60.724,100.75 ccw(c60.724,101.776) pad.ICT@61.449,101.051
NetCA70_1: CA70.1 DA6.2 pad.ICT@31.75,37.25 RA110.1 RA114.1 | length 5.5
  Bottom Layer w0.5: pad.ICT@31.5,37.25 33,37.25 ; pad.ICT@31.962,37.038 cw(c32.474,36.526) 32.474,37.25 cw(c32.474,37.974) pad.ICT@31.962,37.462 ; 33.75,36.5 33,37.25 ; 33.75,37.25 33,37.25 ; 33.75,38 33,37.25
  other v2: 34.75,36.75 35.75,38.75
NetCA73_2: CA73.2 CA76.1 LA2.2 LA3.1 LA16.1 pad.ICT@72.5,95 RA112.1
NetCA77_2: CA77.2 CA78.1 LA4.2 pad.ICT@50.5,114.75 RA111.2 RA115.2 | length 18.1
  Top Layer w1: CA78.1@52.467,112.967 cw(c49.732,110.232) 53.6,110.232 ; CA78.1@52.75,113.25 53.6,112.4 RA115.2@53.6,108 ; CA78.1@53.174,113.674 cw(c52.146,112.646) CA78.1@53.6,112.646
  Bottom Layer w1: pad.ICT@50.5,114.7 cw(c50.5,112.769) 51.866,114.134 ; pad.ICT@50.5,114.75 51.25,114.75 ; pad.ICT@50.511,114.701 cw(c50.77,113.52) 51.625,114.375 ; CA78.1@52.35,113.25 ccw(c51.385,113.25) 52.067,113.933 ccw(c52.75,114.616) CA78.1@52.75,113.65 ; 52.5,114.75 51.25,114.75 ; CA78.1@52.75,113.25 51.25,114.75
NetCA79_1: CA79.1 CA80.1 pad.ICT@45.5,70.75 QA6.2 RA123.2 RA147.2 | length 14.5
  Bottom Layer w1: QA6.2@40.25,69.845 46.795,69.845 ; 43.194,69.845 ccw(c43.194,73.056) pad.ICT@45.465,70.785 ; pad.ICT@45.548,70.765 ccw(c46.795,71.15) 46.795,69.845 ; 47.48,71.281 ccw(c48.231,71.281) CA79.1@47.7,70.75 ; CA80.1@47.48,72.75 47.48,70.53 46.795,69.845
NetCA82_2: CA82.2 CA84.1 LA6.2 LA7.1 pad.ICT@80.683,88.483 RA119.2 RA120.2
  other v1: 81,83.5 79.75,86 80,86.75 79.6,87.5 81,90
NetCA90_1: CA90.1 pad.ICT@104.5,64.5 UA11.1 | length 6
  Top Layer w0.5: UA11.1@101.905,64.75 102.75,64.75 v1(103,64.5) 103.75,63.75 CA90.1@103.75,63.55 ; UA11.1@102.034,64.75 cw(c102.034,63.534) v1@102.894,64.394 ; v1@103.182,64.318 cw(c102.414,63.55) CA90.1@103.5,63.55
  Bottom Layer w0.5: v1(103,64.5) pad.ICT@104.7,64.5
NetCA90_2: CA90.2 DA12.2 LA12.1 pad.ICT@105.25,59.25 UA11.8 | length 1.3
  Bottom Layer w1: pad.ICT@105.25,59.25 v1(105.25,60.5)
NetCA91_1: CA91.1 pad.ICT@95.75,17.25 RA127.2 RA131.2
NetCA92_1: CA92.1 CA93.2 LA10.2 LA11.1 LA18.1 pad.ICT@130.25,34.25 RA129.1 RA132.1
  other v2: 129,39 130.25,39 131.5,39 130.25,40.25 131.5,40.25
  other v4: 127.75,29 127.75,30.75 127.75,32.5 127.75,34.25 127.75,36 127.75,37.5
NetCA98_1: CA98.1 CA100.1 LA14.2 LA15.1 LA20.1 pad.ICT@105.75,52.5 RA137.2 | length 12.5
  Bottom Layer w0.5: 105,51 105.75,51.75 ; 105.375,51.375 ccw(c104.815,51.935) pad.ICT@105.493,52.345 ; pad.ICT@105.579,52.603 ccw(c106.122,52.275) 105.673,51.827 ; 105.75,50.5 105.75,51.75 ; pad.ICT@105.75,52.5 105.75,51.75 ; 105.827,51.827 ccw(c105.378,52.275) pad.ICT@105.921,52.603 ; pad.ICT@106.007,52.345 ccw(c106.685,51.935) 106.125,51.375 ; 106.5,51 105.75,51.75 ; pad.ICT@105.538,52.288 cw(c105.026,51.776) 105.75,51.776 ; pad.ICT@105.538,52.288 cw(c105.026,51.776) 105.75,51.776 ; pad.ICT@105.538,52.288 cw(c105.026,51.776) 105.75,51.776 ; pad.ICT@105.538,52.288 cw(c105.026,51.776) 105.75,51.776 ; 105.75,51.776 cw(c106.474,51.776) pad.ICT@105.962,52.288 ; 105.75,51.776 cw(c106.474,51.776) pad.ICT@105.962,52.288 ; 105.75,51.776 cw(c106.474,51.776) pad.ICT@105.962,52.288 ; 105.75,51.776 cw(c106.474,51.776) pad.ICT@105.962,52.288
NetCA102_2: CA102.2 CA103.1 LA12.2 pad.ICT@99.5,77.5 RA126.2 RA134.2 | length 16.9
  Top Layer w1: RA134.2@101,68.5 LA12.2@109.75,68.5 ; 103.841,68.5 ccw(c103.841,72.009) LA12.2@106.322,69.528 ; 105.048,68.5 cw(c105.048,66.698) LA12.2@106.322,67.972
  Bottom Layer w1: CA103.1@99.217,75.283 ccw(c98.534,75.966) 99.5,75.966 ccw(c100.466,75.966) CA103.1@99.783,75.283 ; CA103.1@99.5,75 pad.ICT@99.5,77.5
NetCA104_1: CA104.1 pad.ICT@95.75,37 RA143.2 RA144.2
NetCA106_2: CA106.2 pad.ICT@18,72.115 RA149.2 UA12.3 | length 10.4
  Top Layer w0.5: CA106.2@15.495,71.445 cw(c16.75,70.191) v1@16.75,71.965 ; RA149.2@15.55,70.05 CA106.2@15.55,71.5 16.165,72.115 v1(16.75,72.115) UA12.3@18.4,72.115 ; CA106.2@15.873,71.823 cw(c16.395,71.3) v1@16.69,71.977
  Bottom Layer w0.5: v1(16.75,72.115) pad.ICT@18,72.115 ; 17.276,72.115 cw(c17.276,71.391) 17.788,71.903 ccw(c17.276,71.391) 17.276,72.115 ; 17.276,72.115 ccw(c17.276,72.839) 17.788,72.327 cw(c17.276,72.839) 17.276,72.115
NetCA108_2: CA108.2 pad.ICT@21.25,70.845 RA151.2 UA12.4 | length 16.9
  Top Layer w0.5: UA12.4@18.4,70.845 v1(20.25,70.845)
  Bottom Layer w0.5: v1(20.25,70.845) 22.295,70.845 23,71.55 RA151.2@23,73.15 ; pad.ICT@20.765,70.845 ccw(c20.765,73.685) 22.773,71.677 ccw(c22.226,72.224) 23,72.224 ; 21.972,70.845 ccw(c21.972,72.478) CA108.2@23.127,71.323 ; CA108.2@22.7,71.5 cw(c22.096,71.5) 22.523,71.073 cw(c22.95,70.646) CA108.2@22.95,71.25 ; RA151.2@22.859,73.009 cw(c22.517,72.667) 23,72.667 cw(c23.483,72.667) RA151.2@23.141,73.009 ; v1@20.526,70.845 cw(c20.526,70.121) 21.038,70.633 ccw(c20.526,70.121) v1@20.526,70.845 ; v1@20.526,70.845 ccw(c20.526,71.569) 21.038,71.057 cw(c20.526,71.569) v1@20.526,70.845 ; 21.974,70.845 cw(c21.974,71.569) 21.462,71.057 ccw(c21.974,71.569) 21.974,70.845 ; 21.974,70.845 ccw(c21.974,70.121) 21.462,70.633 cw(c21.974,70.121) 21.974,70.845
NetCA110_2: CA110.2 CA114.2 DA15.1 pad.ICT@36.75,67.25 QA6.3 RA156.2 | length 35.7
  Bottom Layer w0.5: pad.ICT@36.75,67.25 36.75,67.5 37.75,68.5 37.75,70.317 QA6.3@38.218,70.785 ; pad.ICT@37.05,67.25 cw(c38.378,67.25) 37.439,68.189 ; 37.75,69.584 cw(c39.241,69.584) QA6.3@38.187,70.638
  Bottom Layer w1: CA110.2@37.344,73.356 ccw(c35.234,75.466) 38.218,75.466 ; CA110.2@37.348,72.64 cw(c35.484,70.64) QA6.3@38.194,70.999 ; CA110.2@37.45,72.6 cw(c37.45,71.634) 38.133,72.317 ; CA110.2@37.45,73.4 ccw(c37.45,74.366) 38.133,73.683 ; CA110.2@37.458,73.6 cw(c37.451,72.833) 38.218,72.833 ; CA110.2@38.051,72.649 ccw(c37.648,73.052) 38.218,73.052 ; QA6.3@38.218,70.785 38.218,72.232 ; 38.287,73.837 cw(c40.25,71.874) DA15.1@40.25,74.65 ; RA156.2@38.525,75.825 ccw(c39.959,77.259) DA15.1@40.224,75.248 ; 38.975,74.525 cw(c39.755,73.746) DA15.1@40.174,74.765 ; 38.218,72.232 CA110.2@37.45,73 39.4,74.95 38.05,76.3 CA114.2@38.05,77.75 38.218,77.582 38.218,72.232 ; CA110.2@37.449,72.6 cw(c37.442,71.824) 38.218,71.824 ccw(c37.442,71.824) CA110.2@37.449,72.6
NetCA111_1: CA111.1 pad.ICT@12.25,74.5 RA166.2 RA178.2 UA12.2 | length 11.2
  Top Layer w0.5: v1(12.55,73.2) CA111.1@14,73.2 15.5,73.2 15.685,73.385 UA12.2@18.4,73.385
  Bottom Layer w0.5: pad.ICT@12.051,74.276 cw(c11.067,73.166) v1@12.55,73.166 ; pad.ICT@12.25,74.5 12.85,73.9 RA178.2@14,73.9 ; pad.ICT@12.55,74.2 v1(12.55,73.2) 13.25,73.9
NetCA112_2: CA112.2 pad.ICT@32.25,93.25 QA7.2 RA155.1 RA163.2 | length 11.8
  Bottom Layer w0.5: CA112.2@31.123,98.073 cw(c30.443,97.393) 31.405,97.393 ; RA163.2@31.209,96.559 cw(c30.734,96.084) 31.405,96.084 ; RA163.2@31.209,96.941 ccw(c30.734,97.416) 31.405,97.416 ; QA7.2@31.258,95.397 ccw(c30.905,95.75) 31.405,95.75 ccw(c31.905,95.75) QA7.2@31.552,95.397 ; CA112.2@31.405,98.145 QA7.2@31.405,95.25 32,94.655 pad.ICT@32,93.25 ; RA163.2@31.45,96.65 RA155.1@33,96.65 ; RA163.2@31.491,96.841 ccw(c31.954,97.304) 31.954,96.65 ; 32,94.578 ccw(c33.578,94.578) pad.ICT@32.462,93.462 ; RA155.1@32.809,96.509 ccw(c32.467,96.167) 32.467,96.65 ccw(c32.467,97.133) RA155.1@32.809,96.791
NetCA113_2: CA113.2 pad.ICT@38.25,64.75 RA157.1 RA162.1 RA164.2 UA13.3 UA13.5 | length 29.5
  Top Layer w0.5: UA13.3@35.4,70.115 36.385,70.115 37.655,68.845 ; UA13.3@36.2,70.065 cw(c36.2,69.498) 36.601,69.899 ; CA113.2@38.123,65.677 ccw(c37.696,66.104) 38.3,66.104 ccw(c38.904,66.104) CA113.2@38.477,65.677 ; RA164.2@38.216,67.198 ccw(c36.81,68.745) 38.9,68.745 38.9,67 ; CA113.2@38.3,65.5 38.3,66.95 RA164.2@38.35,67 RA157.1@39.9,67 RA162.1@39.9,65.5 ; 38.3,66.346 cw(c38.954,66.346) RA164.2@38.491,66.809 ; 38.491,68.845 cw(c38.491,68.03) v1@39.208,68.415 ; RA164.2@38.491,66.859 cw(c38.833,66.517) 38.833,67 cw(c38.833,67.483) RA164.2@38.491,67.141 ; RA164.2@38.552,66.828 ccw(c37.837,67.615) 38.9,67.615 ; v1@38.643,68.487 cw(c39.459,67.735) 39.459,68.845 ; v1@38.768,68.179 ccw(c37.655,67.582) 37.655,68.845 ; v1@39.01,68.148 cw(c40.6,66.683) UA13.5@40.6,68.845 37.655,68.845 ; RA162.1@39.759,65.691 ccw(c39.417,66.033) 39.9,66.033 ccw(c40.383,66.033) RA162.1@40.041,65.691 ; RA157.1@39.759,66.809 cw(c39.417,66.467) 39.9,66.467 cw(c40.383,66.467) RA157.1@40.041,66.809 ; RA157.1@39.759,66.859 ccw(c39.417,66.517) 39.417,67 ccw(c39.417,67.483) RA157.1@39.759,67.141
  Bottom Layer w0.5: pad.ICT@38.038,64.962 ccw(c37.526,65.474) 38.25,65.474 ccw(c38.974,65.474) pad.ICT@38.462,64.962 ; pad.ICT@38.25,64.75 38.25,67.6 v1(38.9,68.25)
NetCA116_1: CA116.1 CA118.1 pad.ICT@27.25,100.5 QA12.1 RA180.1 RA184.2 | length 18.6
  Top Layer w0.5: CA116.1@29.75,96.3 RA180.1@29.75,99.9 ; 29.75,97.75 QA12.1@31.7,97.75 ; 29.75,99.25 30,99.5 30.35,99.5 ; RA180.1@29.85,100 30.35,99.5 ; RA184.2@32.15,99.75 31.9,99.5 30.35,99.5
  Bottom Layer w0.25: pad.ICT@27.25,100.75 pad.ICT@27.25,100.5 28.25,99.5 v1(31,99.5) ; 27.976,99.774 cw(c28.701,100.5) 27.675,100.5 ccw(c28.701,100.5) 27.976,99.774 ; 27.976,99.774 ccw(c27.25,99.049) 27.25,100.075 cw(c27.25,99.049) 27.976,99.774 ; 30.336,99.5 cw(c30.336,98.836) 30.806,99.306 ccw(c30.336,98.836) 30.336,99.5 ; 30.336,99.5 ccw(c30.336,100.164) 30.806,99.694 cw(c30.336,100.164) 30.336,99.5
NetCA116_2: CA116.2 pad.ICT@28.25,91.5 QA7.3 QA12.3 RA168.1 RA181.2 UA14.2 | length 18
  Top Layer w0.5: RA181.2@28.25,94.65 28.35,94.75 QA12.3@31.7,94.75 ; v1(28.75,93) 29.88,93 UA14.2@30.23,92.65 29.75,93.13 CA116.2@29.75,94.7
  Bottom Layer w0.5: pad.ICT@28.25,91.5 RA168.1@30.65,91.5 QA7.3@30.65,93.033 ; v1(28.75,93) QA7.3@30.247,93 ; QA7.3@30.319,92.894 cw(c29.519,92.094) 30.65,92.094 ; RA168.1@30.465,91.5 30.465,91.435 RA168.1@30.65,91.25 ; QA7.3@30.465,93.033 QA7.3@30.465,93.218 QA7.3@30.497,93.25 ; RA168.1@30.509,91.359 ccw(c30.167,91.017) 30.167,91.5 ccw(c30.167,91.983) RA168.1@30.509,91.641 ; RA168.1@30.509,91.691 ccw(c30.167,92.033) 30.65,92.033 ccw(c31.133,92.033) RA168.1@30.791,91.691 ; 28.974,91.5 cw(c28.974,92.224) 28.462,91.712 ccw(c28.974,92.224) 28.974,91.5 ; 28.974,91.5 ccw(c28.974,90.776) 28.462,91.288 cw(c28.974,90.776) 28.974,91.5
NetCA117_2: CA117.2 pad.ICT@10.706,68.206 RA172.2 RA179.2 UA13.2 | length 82.8
  Top Layer w0.5: v1(33.75,71.385) UA13.2@35.4,71.385
  Bottom Layer w0.5: 7.64,31.81 cw(c6.531,30.7) RA172.2@8.1,30.7 ; RA172.2@8.75,30.7 6.5,32.95 6.5,64 11.75,69.25 30.75,69.25 31.75,68.25 33.9,68.25 RA179.2@34.9,69.25 ; v1@33.75,71.235 cw(c33.75,69.63) CA117.2@34.885,70.765 ; v1@33.814,71.25 cw(c34.082,70.687) CA117.2@34.523,71.128 ; 34.428,71.385 cw(c34.428,70.589) CA117.2@35.189,70.824 ; 34.438,71.212 ccw(c34.95,71.724) CA117.2@34.95,71 ; RA179.2@34.473,68.823 cw(c34.9,68.396) RA179.2@34.9,69 ; CA117.2@34.559,71.091 cw(c34.217,70.75) CA117.2@34.7,70.75 ; CA117.2@34.711,70.676 ccw(c33.75,70.379) v1(33.75,71.385) 34.265,71.385 34.9,70.75 RA179.2@34.9,69.5 ; RA179.2@34.759,69.441 ccw(c34.417,69.783) 34.9,69.783 ccw(c35.383,69.783) RA179.2@35.041,69.441 ; 34.9,70.026 cw(c35.674,70.026) CA117.2@35.127,70.573 ; 10.194,67.694 cw(c10.706,67.181) 10.706,67.906 ccw(c10.706,67.181) 10.194,67.694 ; 10.194,67.694 ccw(c9.681,68.206) 10.406,68.206 cw(c9.681,68.206) 10.194,67.694 ; 11.218,68.718 cw(c10.706,69.23) 10.706,68.506 ccw(c10.706,69.23) 11.218,68.718 ; 11.218,68.718 ccw(c11.73,68.206) 11.006,68.206 cw(c11.73,68.206) 11.218,68.718
NetCA118_2: CA118.2 pad.ICT@27,97.75 RA181.1 | length 7.5
  Top Layer w0.5: v1@28,97.25 RA181.1@28,96.6 ; CA118.2@28.2,98.5 28,98.3 RA181.1@28,96.6 ; RA181.1@28.25,96.35 RA181.1@28,96.6
  Bottom Layer w0.25: pad.ICT@27,97.75 27.25,97.5 v1(28,97.5) cw(c28,98.153) pad.ICT@27.394,97.909 ; pad.ICT@27.162,97.815 ccw(c27.63,98.004) v1@27.63,97.5 ; pad.ICT@27.336,97.5 cw(c27.336,96.836) 27.806,97.306 ccw(c27.336,96.836) pad.ICT@27.336,97.5 ; pad.ICT@27.336,97.5 ccw(c27.336,98.164) 27.806,97.694 cw(c27.336,98.164) pad.ICT@27.336,97.5
NetCA119_2: CA119.2 pad.ICT@16.25,78.25 RA178.1 RA185.2 UA14.3 | length 36.2
  Top Layer w0.5: v1(28.6,82.85) UA14.3@30.23,82.85
  Bottom Layer w0.5: RA178.1@14,75.5 17,75.5 RA185.2@17,75.6 ; RA178.1@14.191,75.741 ccw(c14.774,76.324) 14.774,75.5 ; 14.776,75.5 ccw(c14.776,76.274) 15.323,75.727 ccw(c13.086,77.964) pad.ICT@16.25,77.964 ; CA119.2@15.677,75.373 ccw(c14.293,76.757) 16.25,76.757 ; CA119.2@15.677,75.727 ccw(c16.224,76.274) 16.224,75.5 ; pad.ICT@16.05,78.25 cw(c17.378,78.25) 16.439,79.189 ; 16.226,75.5 ccw(c16.226,76.324) RA185.2@16.809,75.741 ; 16.25,75.55 16.25,79 19.5,82.25 28,82.25 v1(28.6,82.85) ; pad.ICT@16.55,78.25 cw(c19.085,78.25) 17.292,80.042 ; 16.25,77.526 cw(c16.974,77.526) 16.462,78.038 ccw(c16.974,77.526) 16.25,77.526 ; 16.25,77.526 ccw(c15.526,77.526) 16.038,78.038 cw(c15.526,77.526) 16.25,77.526 ; 16.25,78.974 cw(c15.526,78.974) 16.038,78.462 ccw(c15.526,78.974) 16.25,78.974 ; 16.25,78.974 ccw(c16.974,78.974) 16.462,78.462 cw(c16.974,78.974) 16.25,78.974
NetCA120_2: CA120.2 DA16.1 pad.ICT@26.25,78.5 RA182.1 RA183.1 | length 8.2
  Top Layer w0.5: RA183.1@24.75,76.85 24.75,80.95 DA16.1@24.8,81
  Bottom Layer w0.5: RA182.1@24.5,78.35 24.75,78.6 v1(24.75,79.5) ; RA182.1@24.6,78.5 pad.ICT@26.25,78.5 ; pad.ICT@26.038,78.288 ccw(c25.526,77.776) 25.526,78.5 ccw(c25.526,79.224) pad.ICT@26.038,78.712
NetCC1_2: CC1.2 pad.ICT@29.5,160.75 RC1.2 RC2.1 UC624.12 | length 14.8
  Top Layer w0.5: UC624.12@26.6,159.27 v1(28.253,159.27) 28.733,159.75 ; v1@28.261,159.278 cw(c29.4,158.139) RC1.2@29.4,159.75 ; v1@28.499,159.516 cw(c29.139,158.877) RC1.2@29.353,159.756 ; RC1.2@29.15,159.75 28.733,159.75 ; RC1.2@29.224,160.044 cw(c28.733,160.306) 28.733,159.75 ; RC1.2@29.243,160 RC1.2@29.4,160 29.45,160.05 CC1.2@29.45,161.5 ; RC1.2@29.259,160.191 ccw(c28.796,160.654) 29.45,160.654 ; CC1.2@29.273,161.323 cw(c28.846,160.896) 29.45,160.896 cw(c30.054,160.896) CC1.2@29.627,161.323
  Bottom Layer w0.5: RC2.1@26.87,159.27 v1(28.253,159.27) ; RC2.1@26.991,159.109 cw(c27.381,158.719) 27.381,159.27 ; v1@28.205,159.27 v1(28.253,159.27) ; v1@28.253,159.42 ccw(c28.253,160.427) 28.965,159.715 ; 28.77,159.52 ccw(c27.712,160.578) pad.ICT@29.201,160.721 ; pad.ICT@29.5,160.75 29.5,160.25 28.52,159.27 v1(28.253,159.27)
NetCC2_2: CC2.2 pad.ICT@60.5,119.75 RC5.1 RC6.1 UC627.3 | length 13.8
  Top Layer w0.5: v1(61.5,120.5) 61.73,120.27 UC627.3@63.15,120.27 ; v1@61.606,120.606 ccw(c62.417,121.417) UC627.3@62.417,120.27
  Bottom Layer w0.5: pad.ICT@60.5,119.75 61.25,120.5 v1(61.5,120.5) 62.65,120.5 RC6.1@62.9,120.25 62.95,120.2 CC2.2@62.95,117.25 ; pad.ICT@60.5,120.05 ccw(c60.5,120.774) 61.012,120.262 ccw(c61.524,119.75) pad.ICT@60.8,119.75 ; pad.ICT@60.817,120.067 cw(c61.5,119.384) v1@61.5,120.35 ; 61.934,120.5 cw(c61.934,119.334) RC6.1@62.759,120.159 ; RC5.1@62.759,118.559 cw(c62.296,118.096) 62.95,118.096 ; RC5.1@62.759,118.941 ccw(c62.296,119.404) 62.95,119.404 ; RC6.1@62.759,120.059 cw(c62.296,119.596) 62.95,119.596 ; CC2.2@62.773,117.427 ccw(c62.346,117.854) 62.95,117.854 ccw(c63.554,117.854) CC2.2@63.127,117.427
NetCC3_1: CC3.1 pad.ICT@108.75,136 RC10.1 RC16.2 TP3.1 UC635.1 | length 24.4
  Top Layer w0.5: CC3.1@103.123,137.073 cw(c102.696,136.646) 103.3,136.646 cw(c103.904,136.646) CC3.1@103.477,137.073 ; RC10.1@103.3,135.8 CC3.1@103.3,137.25 ; 103.3,136.404 ccw(c103.954,136.404) RC10.1@103.491,135.941 ; RC10.1@103.35,135.75 105,135.75 UC635.1@105.69,135.06 ; RC10.1@103.491,135.609 cw(c103.833,135.267) 103.833,135.75 cw(c103.833,136.233) RC10.1@103.491,135.891 ; TP3.1@106.111,136.611 cw(c105.172,135.672) 106.5,135.672 cw(c107.828,135.672) TP3.1@106.889,136.611 ; UC635.1@106.365,135.095 ccw(c106.038,135.422) 106.5,135.422 ; UC635.1@106.5,135.16 TP3.1@106.5,137 ; UC635.1@105.69,135.06 UC635.1@106.4,135.06 UC635.1@105.69,135.06
  Bottom Layer w0.5: RC16.2@103.35,135.75 105.25,135.75 TP3.1@106.5,137 107.5,136 pad.ICT@108.75,136 ; RC16.2@103.491,135.609 cw(c103.833,135.267) 103.833,135.75 cw(c103.833,136.233) RC16.2@103.491,135.891 ; TP3.1@105.95,137 cw(c104.622,137) 105.561,136.061 cw(c106.5,135.122) 106.5,136.45 cw(c106.5,135.122) 107.439,136.061 cw(c108.378,137) TP3.1@107.05,137 ; pad.ICT@108.538,135.788 ccw(c108.026,135.276) 108.026,136 ccw(c108.026,136.724) pad.ICT@108.538,136.212
NetCC3_2: CC3.2 pad.ICT@99.25,137 RC9.2 RC10.2 UC635.2 | length 16.3
  Top Layer w0.5: v1(100.5,137.25) CC3.2@101.7,137.25 ; RC10.2@101.509,135.559 cw(c101.046,135.096) 101.7,135.096 ; RC10.2@101.509,135.941 ccw(c101.046,136.404) 101.7,136.404 ; CC3.2@101.523,137.427 cw(c101.096,137.854) 101.096,137.25 cw(c101.096,136.646) 101.523,137.073 cw(c101.096,136.646) 101.7,136.646 cw(c102.304,136.646) CC3.2@101.877,137.073 ; CC3.2@101.7,137 101.7,134.8 102,134.5 104.75,134.5 105.46,133.79 UC635.2@106.4,133.79 ; 105.276,133.974 ccw(c105.6,134.299) UC635.2@105.6,133.84
  Bottom Layer w0.5: pad.ICT@99.25,136.75 99.75,137.25 v1(100.5,137.25) ; pad.ICT@99.471,136.797 cw(c100.5,135.855) v1(100.5,137.25) ; RC9.2@101.509,137.109 ccw(c101.167,136.767) 101.167,137.25 ccw(c101.167,137.733) RC9.2@101.509,137.391 ; RC9.2@101.65,137.25 v1(100.5,137.25)